# Altium PCB MCU103A.PcbDoc (part 6 of 6)
Units mm, origin at the board's own origin, x right, y up, seen from the top; angles counter-clockwise.
Board outline 58.42 x 139.7 mm, 4 copper layers (Top Signal, GND, PWR, Bottom Signal), stack 1.565 mm thick; 256 components, 210 nets, 1058 pads, 772 vias.
Unrouted connection lines stored in the file: 237.
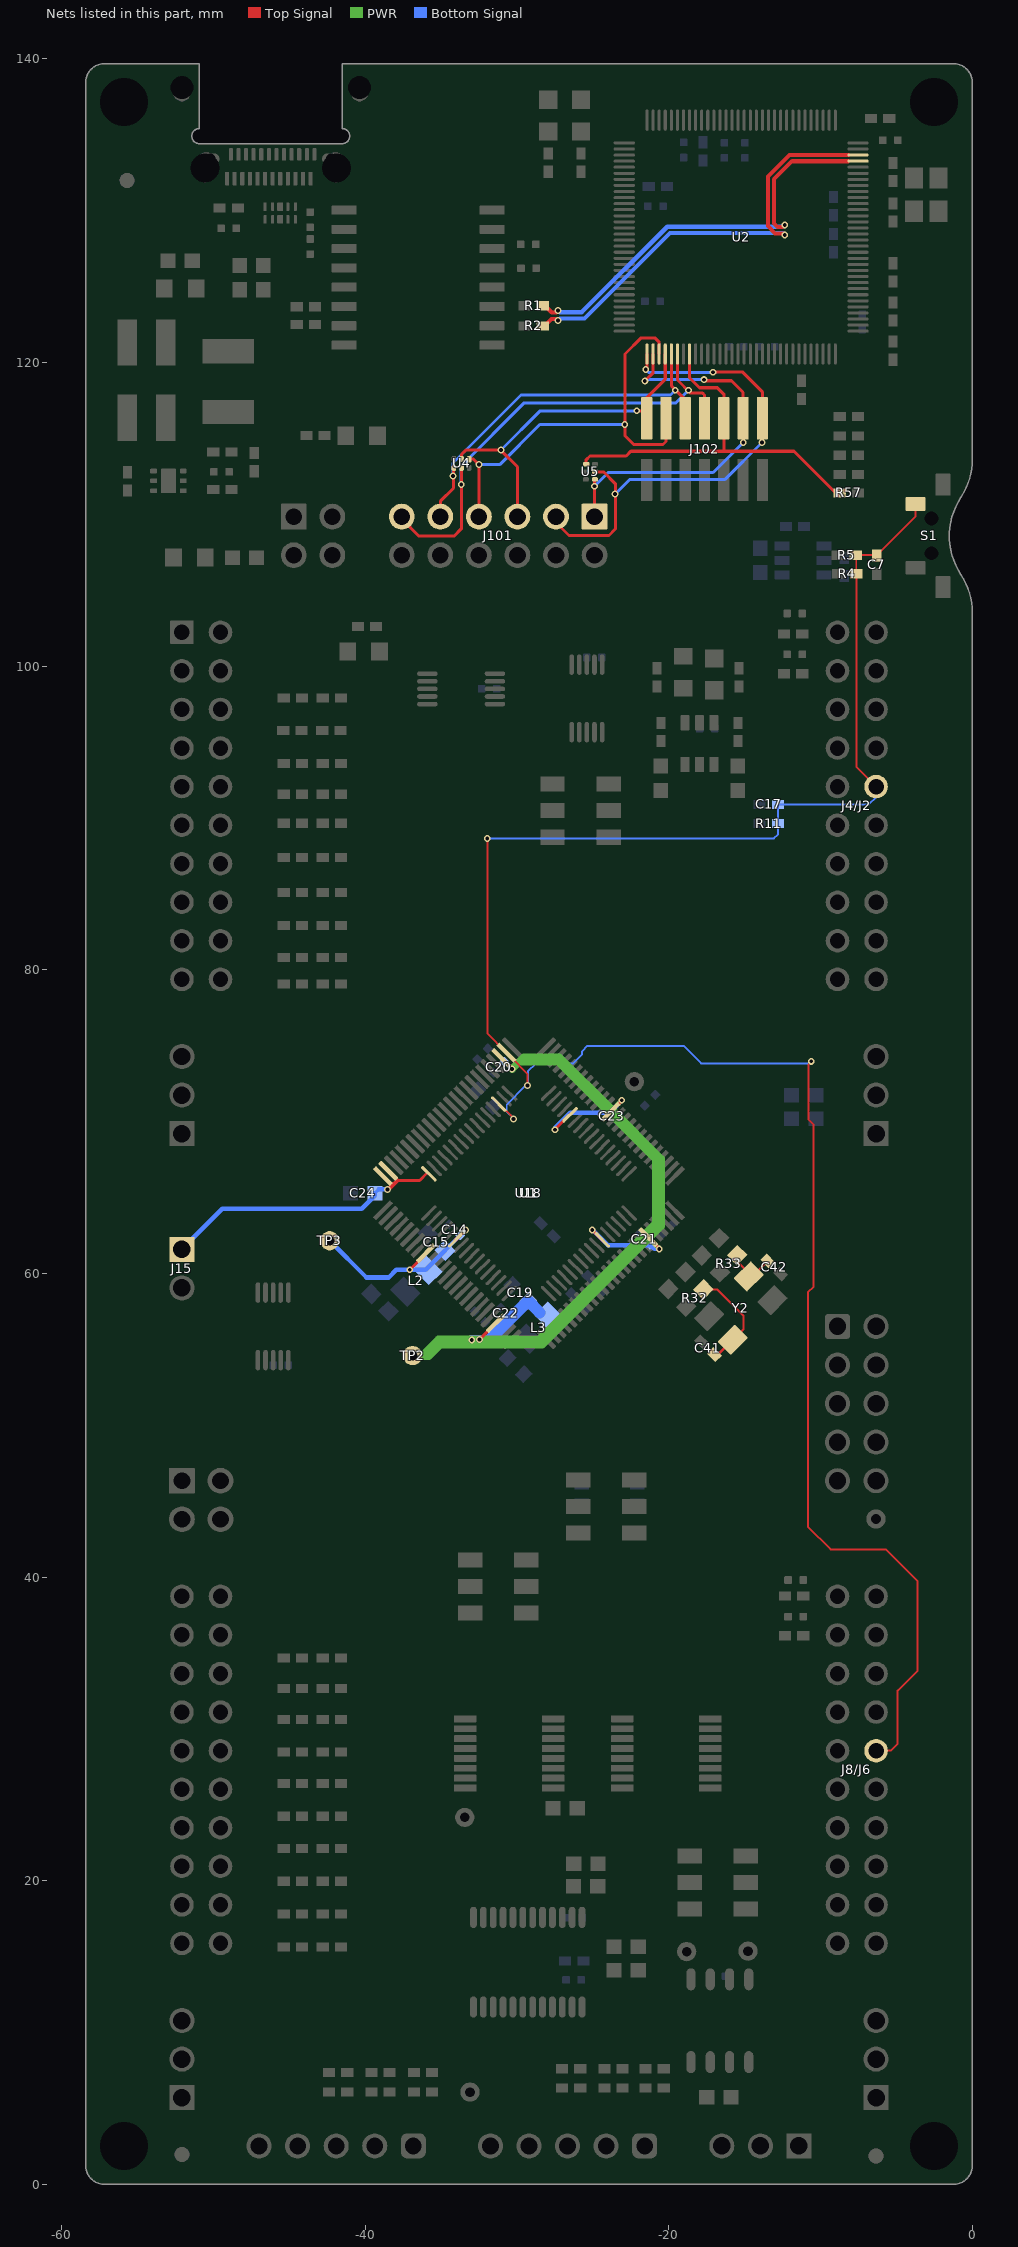
[diagram p7: the nets of this part, all layers, seen from the top]

## Via types
v1: diameter 0.45, hole 0.25, Top Signal to Bottom Signal, tented both sides, 726 vias
v2: diameter 0.5, hole 0.3, Top Signal to Bottom Signal, tented both sides, 22 vias
v3: diameter 0.7, hole 0.4, Top Signal to Bottom Signal, tented both sides, 17 vias
v4: diameter 0.4, hole 0.2, Top Signal to Bottom Signal, tented both sides, 5 vias
v5: diameter 0.5, hole 0.2, Top Signal to Bottom Signal, 2 vias

## Nets (pads, with @x,y where several pads share a name; then routed paths per layer and width w, separated by ;. In a path a pad name is that pad's centre, name@x,y a point inside that pad or via, vN(x,y) a via of type N, cw(c..) or ccw(c..) an arc to the next point about the centre after c; other vN are vias at no path point) (continued)
VDDA: C14.2 C15.1 L2.2 TP3.1 U1.34 U18.22 | length 13.7
  Top Signal w0.127: v1(-33.391,62.87) v1@-33.391,62.876
  Top Signal w0.2: v1@-37.143,60.154 U1.34@-36.126,61.171 ; U18.22@-34.073,62.194 v1@-33.391,62.876
  Bottom Signal w0.3: TP3.1@-42.337,62.162 -39.915,59.74 -38.443,59.74 -37.944,60.239 -37.079,60.239 v1(-37.066,60.252) -36.009,60.252 v1(-33.391,62.87)
VDDIO: C19.2 C20.2 C21.2 C22.2 C23.2 L3.2 TP2.1 U1.3 U1.47 U1.70 U1.88 U18.43 U18.60 | length 98.4
  Top Signal w0.2: v1@-32.523,55.612 U1.47@-31.506,56.63 ; U1.3@-31.049,74.209 v1@-30.308,73.469 ; v1@-27.515,69.494 U18.60@-26.498,70.511 ; v1@-25.014,62.85 U18.43@-24.297,62.134 ; U1.88@-23.477,71.005 -23.066,71.416 v1@-23.066,71.43 ; U1.70@-21.424,62.443 v1@-20.617,61.636
  PWR w0.3: -24.019,70.68 -23.835,70.68 -23.74,70.774 -23.099,71.416 v1@-23.099,71.422 ; -21.586,62.596 -21.586,62.583 -21.322,62.319 v1(-20.628,61.625)
  PWR w0.5: TP2.1@-36.658,54.69 -36.136,54.69 -35.17,55.656 v1(-32.47,55.656) -28.526,55.656 -21.586,62.596 -20.857,63.325 -20.857,67.518 -24.019,70.68 -27.288,73.949 -29.851,73.949 ; TP2.1@-36.494,54.559 -35.8,54.559 -35.044,55.315 -28.327,55.315 -21.322,62.319 -20.516,63.126 -20.516,67.55 -23.74,70.774 -27.217,74.251 -29.549,74.251 -29.851,73.949 ; v1(-30.326,73.475) -29.851,73.949
  Bottom Signal w0.2: v1(-32.47,55.656) v1@-32.41,55.656 ; v1(-30.326,73.475) v1@-30.326,73.478 ; v1@-27.516,69.497 v1@-27.516,69.503 ; v1@-25.069,62.921 -25.027,62.879 v1(-25.045,62.862) ; v1@-23.116,71.43 -23.066,71.43 v1@-23.066,71.416
  Bottom Signal w0.3: C20.2@-30.822,73.975 v1@-30.326,73.478 ; v1@-27.516,69.503 -27.466,69.553 -27.466,69.635 -26.496,70.605 -24.228,70.605 C23.2@-24.106,70.728 -23.769,70.728 v1@-23.066,71.43 ; v1@-25.027,62.879 -24.01,61.862 -21.307,61.862 C21.2@-21.25,61.919 -20.956,61.625 v1(-20.628,61.625)
  Bottom Signal w0.762: v1@-32.98,55.567 -31.898,55.567 C19.2@-29.267,58.198 L3.2@-28.49,57.421
  other v1: -32.98,55.631 -27.495,69.476 -23.103,71.418
VREFHI: C24.1 J15.1 U1.24 U1.25 U18.16 | length 21.9
  Top Signal w0.2: J15.1@-52.07,61.595 J15.1@-52.014,61.539 ; U1.25@-39.274,66.871 U1.25@-38.827,66.423 -38.252,65.848 -38.221,65.848 ; U1.24@-38.474,66.777 -37.831,66.134 ; U18.16@-35.892,66.657 -36.415,66.134 -37.831,66.134 ; -38.221,65.848 v1(-38.524,65.545) -38.42,65.545 -38.117,65.848 ; -38.221,65.848 -38.117,65.848 ; -38.221,65.848 -37.935,66.134 -37.831,66.134 ; -38.117,65.848 -37.831,66.134
  Bottom Signal w0.23: C24.1@-39.36,65.278 C24.1@-39.093,65.545
  Bottom Signal w0.3: J15.1@-52.07,61.595 -49.403,64.262 -40.218,64.262 -39.36,65.12 C24.1@-39.36,65.278 ; C24.1@-39.093,65.545 v1(-38.524,65.545)
XDS_DM: R1.2 U2.93 | length 28
  Top Signal w0.27: R1.2@-28.302,123.745 -28.169,123.745 -27.712,123.289 -27.44,123.289 v1(-27.297,123.432) ; v1@-12.32,129.14 -12.523,128.937 -12.837,128.937 -13.06,129.16 -13.06,132.08 -11.874,133.266 U2.93@-8.197,133.266
  Bottom Signal w0.2: v1(-27.297,123.432) -27.297,123.375 -27.266,123.344 -27.237,123.373 v1@-27.178,123.432
  Bottom Signal w0.27: v1(-27.297,123.432) -27.237,123.373 -27.181,123.317 -25.737,123.317 -20.104,128.95 -12.47,128.95 v1(-12.36,129.06)
XDS_DP: R2.2 U2.94 | length 29.2
  Top Signal w0.27: R2.2@-28.302,122.412 -28.187,122.412 -27.73,122.869 -27.356,122.869 v1@-27.27,122.782 ; v1@-12.3,128.36 -12.457,128.517 -13.011,128.517 -13.48,128.986 -13.48,132.254 -12.048,133.686 U2.94@-8.176,133.686
  Bottom Signal w0.27: v1@-27.27,122.782 -27.155,122.897 -25.563,122.897 -19.93,128.53 -12.48,128.53 v1(-12.36,128.41)
  other v1: -27.297,122.782
XDS_RESET_OUT: J102.10 R57.1 U2.40 U5.1 | length 26.4
  Top Signal w0.127: R57.1@-9.022,111.424 R57.1@-8.742,111.424
  Top Signal w0.2: U5.1@-25.444,113.306 -25.444,113.603 -25.192,113.855 -22.807,113.855 -22.499,114.163 -11.761,114.163 R57.1@-9.022,111.424 ; U2.40@-18.635,120.57 -18.635,118.995 -17.985,118.345 -16.802,118.345 -16.378,117.921 J102.10@-16.378,116.335 -16.378,114.17
XDS_RXD: J101.3 J102.14 U2.33 U5.5 | length 33.3
  Top Signal w0.127: J101.3@-27.432,109.486 J101.3@-27.432,109.855
  Top Signal w0.2: J101.3@-27.432,109.486 -27.432,109.473 -26.576,108.617 -23.947,108.617 -23.523,109.041 -23.523,112.03 -24.299,112.806 U5.5@-24.869,112.806 ; v1@-21.609,119.519 -21.435,119.693 U2.33@-21.435,120.57 ; v1@-17.098,119.368 -15.131,119.368 -13.838,118.075 J102.14@-13.838,116.335 -13.862,116.311 v1(-13.862,114.743)
  Bottom Signal w0.2: v1(-23.539,111.339) -22.591,112.287 -16.318,112.287 v1(-13.862,114.743) ; v1(-21.518,119.549) -21.333,119.364 v1(-17.098,119.364)
XDS_TCK_SWDCLK: J101.7 J102.4 U2.35 U4.1 | length 28.5
  Top Signal w0.2: U4.1@-33.153,113.64 -32.871,113.64 v1(-32.512,113.281) J101.7@-32.512,109.855 ; U2.35@-20.635,120.57 -20.635,121.35 -20.918,121.633 -21.817,121.633 -22.888,120.562 -22.888,115.177 -22.314,114.603 -20.384,114.603 -20.188,114.799 J102.4@-20.188,116.335
  Bottom Signal w0.2: v1(-32.512,113.281) -31.139,113.281 -28.499,115.921 v1(-22.902,115.921)
XDS_TDI: J101.11 J102.8 U2.38 U4.5 | length 32.4
  Top Signal w0.2: J101.11@-37.592,109.855 -37.592,109.712 -36.451,108.571 -34.154,108.571 -33.668,109.057 U4.5@-33.668,113.021 ; U2.38@-19.435,120.57 -19.435,118.857 -18.569,117.991 -17.775,117.991 -17.648,117.864 J102.8@-17.648,116.335
  Bottom Signal w0.2: v1(-33.677,111.966) -33.677,113.197 -29.526,117.348 -19.533,117.348 v1(-18.703,118.178)
XDS_TDO_SWO: J101.9 J102.6 U2.37 U4.4 | length 25.6
  Top Signal w0.2: J101.9@-35.052,109.855 -35.052,110.861 -34.184,111.729 U4.4@-34.184,113.005 ; U2.37@-19.835,120.57 -19.835,118.48 -18.918,117.563 J102.6@-18.918,116.335
  Bottom Signal w0.2: v1(-34.217,112.525) -34.217,113.388 -29.74,117.865 -19.894,117.865 v1(-19.581,118.178)
XDS_TMS_SWDIO: J101.5 J102.2 U2.36 U4.2 | length 23.3
  Top Signal w0.2: U4.2@-33.653,113.665 -33.653,113.962 -33.378,114.237 -31.077,114.237 -29.972,113.132 J101.5@-29.972,109.855 ; v1(-22.113,116.825) -21.538,116.825 J102.2@-21.458,116.905 ; J102.2@-21.458,116.335 J102.2@-21.458,116.905 ; U2.36@-20.235,120.57 -20.235,118.91 -21.458,117.687 J102.2@-21.458,116.905
  Bottom Signal w0.2: v1(-31.06,114.241) -28.476,116.825 v1(-22.113,116.825)
XDS_TXD: J101.1 J102.12 U2.34 U5.4 | length 25.5
  Top Signal w0.127: U5.4@-24.892,112.22 U5.4@-24.755,112.357
  Top Signal w0.2: J101.1@-24.892,109.855 U5.4@-24.892,112.22 ; v1(-21.58,118.788) -21.035,119.333 U2.34@-21.035,120.57 ; v1@-17.728,118.806 -15.871,118.806 -15.108,118.043 J102.12@-15.108,116.335 -15.095,116.322 v1(-15.095,114.743)
  Bottom Signal w0.2: v1(-24.901,111.858) -23.999,112.76 -17.078,112.76 v1(-15.095,114.743) ; v1@-21.402,118.877 v1(-17.691,118.877)
XRSn: C7.1 C17.2 J4/J2.16 J8/J6.56 R4.1 R5.2 R11.1 S1.4 U1.2 U18.3 | length 146.4
  Top Signal w0.127: v1@-31.953,88.657 -31.953,75.812 U1.2@-30.695,74.555 ; U18.3@-31.243,71.192 -31.203,71.192 -30.226,70.215 v1(-30.226,70.175) ; U1.2@-30.409,74.244 -30.393,74.244 -29.31,73.161 v1(-29.31,72.381) -29.458,72.381 v1@-29.467,72.372 ; v1(-10.614,73.977) -10.614,73.944 -10.811,73.747 -10.811,70.16 -10.462,69.811 -10.462,59.132 -10.836,58.758 -10.836,43.326 -9.337,41.827 -5.698,41.827 -3.611,39.74 -3.611,33.848 -4.934,32.525 -4.934,29.015 -5.374,28.575 J8/J6.56@-6.35,28.575 J8/J6.56@-6.35,28.769 ; R4.1@-7.657,106.094 -7.657,107.287 R5.2@-7.685,107.315 -6.305,107.315 -3.748,109.872 S1.4@-3.748,110.685 ; R4.1@-7.649,106.029 -7.649,93.374 J4/J2.16@-6.35,92.075
  Bottom Signal w0.127: v1(-31.96,88.657) -13.074,88.657 -12.818,88.913 R11.1@-12.818,89.632 C17.2@-12.818,90.902 -6.825,90.902 -6.35,91.377 J4/J2.16@-6.35,92.075 ; v1(-30.226,70.175) -30.226,70.217 -30.674,70.665 -30.674,71.132 v1@-29.441,72.364 ; v1@-29.459,72.381 -29.488,72.41 -29.465,72.434 -29.418,72.387 v1@-29.424,72.381 ; v1(-29.31,72.381) v1@-29.424,72.381 ; v1(-10.614,73.977) -10.614,73.854 -10.759,73.999 -10.759,73.838 -17.878,73.838 -19.031,74.991 -25.363,74.991 -25.715,74.639 -25.715,74.449 -26.34,73.824 -28.776,73.824 -29.281,73.319 -29.281,72.204 -29.384,72.307 v1@-29.441,72.364 ; v1@-29.441,72.364 v1@-29.424,72.381 ; v1@-29.441,72.364 -29.458,72.381 v1@-29.424,72.381
XTAL_X1: C42.1 R33.2 Y2.3 | length 3.5
  Top Signal w0.152: R33.2@-15.5,61.212 -15.5,60.799 Y2.3@-14.506,59.805 ; Y2.3@-14.732,59.805 Y2.3@-14.506,59.805 ; C42.1@-13.482,60.828 Y2.3@-14.506,59.805
XTAL_X2: C41.1 R32.2 Y2.1 | length 8.4
  Top Signal w0.152: R32.2@-17.728,58.944 -16.807,58.944 -15.078,57.215 -15.078,56.329 Y2.1@-15.704,55.703 ; C41.1@-16.996,54.659 -16.766,54.659 Y2.1@-15.792,55.633 ; Y2.1@-16.324,55.084 Y2.1@-15.704,55.703 ; Y2.1@-15.704,56.502 Y2.1@-15.704,55.703
pads on no net: FID1.1 FID2.1 FID3.1 FID4.1 FID5.1 FID6.1 J11.9 J102.7 M1.0 M2.0 M3.0 M4.0 M5.0 M6.0 M7.0 M8.0 M9.0 M10.0 M11.0 M12.0 MH1.1 MH2.1 MH3.1 MH4.1 S1. U1.37 U1.41 U1.42 U2.1 U2.2 U2.5 U2.6 U2.11 U2.12 U2.13 U2.14 U2.15 U2.18 U2.19 U2.20 U2.21 U2.22 U2.23 U2.24 U2.25 U2.27 U2.29 U2.30 U2.31 U2.32 U2.41 U2.42 U2.43 U2.44 U2.45 U2.46 U2.49 U2.50 U2.53 U2.54 U2.56 U2.57 U2.65 U2.67 U2.71 U2.72 U2.73 U2.74 U2.75 U2.76 U2.77 U2.78 U2.81 U2.82 U2.83 U2.84 U2.85 U2.86 U2.91 U2.92 U2.95 U2.97 U2.98 U2.99 U2.100 U2.102 U2.103 U2.104 U2.105 U2.106 U2.107 U2.108 U2.109 U2.110 U2.111 U2.112 U2.116 U2.117 U2.118 U2.119 U2.120 U2.121 U2.123 U2.124 U2.125 U2.126 U2.127 U2.128 U5.2 U15.5 U15.8 U16.3@-45.597,129.434 U16.8@-45.597,130.27 U101.5 U101.7@-52.959,111.76 U101.7@-52.959,112.66 USB101.A2 USB101.A3 USB101.A8 USB101.A10 USB101.A11 USB101.B2 USB101.B3 USB101.B8 USB101.B10 USB101.B11

## Polygon pours and split planes (outlines as drawn)
+3V3_XDS110 on PWR "PWR-+3V3_XDS110" (solid, remove dead copper, pour order 12): -35.67,139.053 -0.635,139.053 -0.635,108.965 -43.315,108.965 -43.315,117.348 -37.249,117.348 -35.675,118.922
USB_GND on PWR "Top Signal-USB_GND" (solid, remove dead copper, pour order 49): -58.545,119.969 -38.523,119.969 -38.175,120.317 -38.175,139.757 -57.488,139.757 -57.488,139.683 -58.545,138.626
+5V0_MCU on PWR "PWR_+5V0_MCU_P041" (solid, remove dead copper, pour order 41): -43.849,108.2 -57.773,108.2 -57.773,0.393 -57.785,0.381 -19.747,0.381 -19.747,13.493 -20.478,14.224 -51.354,14.224 -53.975,16.844 -53.975,102.647 -52.612,104.01 -44.746,104.01 -43.849,104.907
+3V3_MCU on PWR "PWR-+3V3_MCU" (solid, remove dead copper, pour order 10): -53.349,102.928 -53.349,17.232 -51.083,14.966 -20.185,14.704 -19.095,13.724 -19.095,0.647 -0.635,0.635 -0.635,14.822 -0.635,108.2 -43.328,108.2 -43.328,104.599 -44.9,103.131 -53.214,103.131
+5V0_XDS110 on PWR "PWR_+5V0_XDS110_P042" (solid, remove dead copper, pour order 42): -57.773,117.348 -57.773,108.965 -43.51,108.965 -43.51,117.348
VDDIO on PWR "PWR-VDDIO" (solid, remove dead copper, pour order 8): -37.916,53.652 -27.787,53.652 -20.06,61.379 -20.06,69.251 -25.767,74.958 -35.692,74.958 -43.84,66.81 -43.84,59.576
VDD on PWR "PWR-VDD" (solid, remove dead copper, pour order 6): -29.297,56.09 -22.442,62.945 -22.442,67.588 -27.046,72.192 -30.761,72.192 -30.869,72.084 -36.529,66.424 -36.529,59.392 -33.227,56.09
GND on Top Signal "GND-GND" (solid, remove dead copper, pour order 57): -58.442,117.302 -37.295,117.302 -35.61,118.987 -35.61,139.742 -1.012,139.742 0.015,138.715 0.015,0.85 -0.848,-0.013 -57.498,-0.013 -58.427,0.916 -58.427,117.262 -58.405,117.284
USB_GND on Top Signal "Top Signal-USB_GND" (solid, remove dead copper, pour order 20): -58.545,119.969 -38.523,119.969 -38.175,120.317 -38.175,139.757 -57.488,139.757 -57.488,139.683 -58.545,138.626
GND on GND "GND-GND" (solid, remove dead copper, pour order 53): -58.442,117.302 -37.295,117.302 -35.61,118.987 -35.61,139.742 -1.012,139.742 0.015,138.715 0.015,0.85 -0.848,-0.013 -57.498,-0.013 -58.427,0.916 -58.427,117.262 -58.405,117.284
USB_GND on GND "Top Signal-USB_GND" (solid, remove dead copper, pour order 47): -58.545,119.969 -38.523,119.969 -38.175,120.317 -38.175,139.757 -57.488,139.757 -57.488,139.683 -58.545,138.626
GND on Bottom Signal "GND-GND" (solid, remove dead copper, pour order 59): -58.442,117.302 -37.295,117.302 -35.61,118.987 -35.61,139.742 -1.012,139.742 0.015,138.715 0.015,0.85 -0.848,-0.013 -57.498,-0.013 -58.427,0.916 -58.427,117.262 -58.405,117.284
USB_GND on Bottom Signal "Top Signal-USB_GND" (solid, remove dead copper, pour order 51): -58.545,119.969 -38.523,119.969 -38.175,120.317 -38.175,139.757 -57.488,139.757 -57.488,139.683 -58.545,138.626

## Keep-outs
Keep-Out Layer:
  lines w0.2: -50.92,139.7 -57.15,139.7 ccw(c-57.15,138.43) -58.42,138.43 -58.42,1.27 ccw(c-57.15,1.27) -57.15,0 -1.27,0 ccw(c-1.27,1.27) 0,1.27 0,103.505 ccw(c-4.614,103.505) -0.762,106.045 cw(c3.09,108.585) -0.762,111.125 ccw(c-4.614,113.665) 0,113.665 0,138.43 ccw(c-1.27,138.43) -1.27,139.7 -41.52,139.7
  text ".Layer_Name" at -43.384,-21.709 h1.52

## Other copper
Top Signal:
  pour cut-out: -11.955,42.67 -11.959,42.056 -12.95,42.056 -12.95,42.645
  pour cut-out: -18.451,55.654 -18.934,55.171 -19.251,55.49 -18.769,55.972
  pour cut-out: -32.562,41.946 -32.567,41.332 -34.738,41.332 -34.738,41.891
  pour cut-out: -24.864,45.299 -27.066,45.299 -27.064,45.749 -24.864,45.749
  pour cut-out: -21.173,45.329 -23.374,45.329 -23.372,45.779 -21.173,45.779
  pour cut-out: -19.501,46.432 -20.503,46.432 -20.501,46.434 -20.501,46.882 -19.521,46.882 -19.511,46.892 -19.501,46.882
  pour cut-out: -46.182,79.553 -46.182,80.555 -46.18,80.553 -45.732,80.553 -45.732,79.573 -45.722,79.563 -45.732,79.553
  pour cut-out: -22.935,134.47 -22.935,122.07 -21.435,120.57 -9.035,120.57 -7.535,122.07 -7.535,134.47 -9.035,135.97 -21.435,135.97
  pour cut-out: -30.413,71.96 -27.831,71.96 -27.831,71.784 -22.616,66.569 -22.616,63.987 -27.919,58.684 -30.501,58.684 -35.846,64.029 -35.846,66.527
  pour cut-out: -28.544,92.549 -29.546,92.549 -29.544,92.551 -29.544,92.999 -28.564,92.999 -28.554,93.009 -28.544,92.999
  pour cut-out: -25.966,92.529 -26.968,92.529 -26.966,92.531 -26.966,92.979 -25.986,92.979 -25.976,92.989 -25.966,92.979
  pour cut-out: -24.036,84.62 -25.038,84.62 -25.036,84.622 -25.036,85.07 -24.056,85.07 -24.046,85.08 -24.036,85.07
  pour cut-out: -39.95,84.432 -39.95,85.434 -39.948,85.432 -39.5,85.432 -39.5,84.452 -39.49,84.442 -39.5,84.432
  pour cut-out: -36.374,85.45 -35.372,85.45 -35.374,85.448 -35.374,85 -36.354,85 -36.364,84.99 -36.374,85
  pour cut-out: -33.201,85.97 -32.199,85.97 -32.201,85.968 -32.201,85.52 -33.181,85.52 -33.191,85.51 -33.201,85.52
  pour cut-out: -32.771,127.279 -32.771,121.804 -31.7,121.804 -31.7,122.024 -31.7,127.279 -32.751,127.279
  pour cut-out: -51.865,123.98 -52.315,123.98 -52.315,124.13 -51.865,124.13
  pour cut-out: -17.744,101.137 -18.31,101.141 -18.31,101.419 -17.751,101.419
  pour cut-out: -28.245,40.58 -28.25,39.966 -30.421,39.966 -30.421,40.525
  pour cut-out: -32.012,40.566 -32.017,39.952 -34.188,39.952 -34.188,40.511
  pour cut-out: -17.564,19.31 -17.564,18.751 -19.677,18.751 -19.677,19.31
  pour cut-out: -13.844,19.332 -13.849,18.718 -16.02,18.718 -16.02,19.277
  pour cut-out: -13.827,21.147 -13.832,20.533 -16.003,20.533 -16.003,21.092
  pour cut-out: -19.448,21.045 -19.452,20.479 -19.73,20.479 -19.73,21.038
  pour cut-out: -23.546,83.382 -24.112,83.386 -24.112,83.664 -23.553,83.664
  text ".Layer_Name" at -43.888,-21.59 h1.52
GND:
  text ".Layer_Name" at -42.043,-21.667 h1.52
PWR:
  text ".Layer_Name" at -41.964,-21.552 h1.52
Bottom Signal:
  pour cut-out: -32.249,63.352 -31.851,63.756 -32.048,63.953 -32.443,63.557
  pour cut-out: -36.122,58.553 -35.724,58.957 -35.921,59.153 -36.316,58.758
  pour cut-out: -28.013,55.423 -27.615,55.827 -27.811,56.024 -28.207,55.628
  text ".Layer_Name" at -43.594,-21.656 h1.52

## Silkscreen, mask and mechanical layers (free items; w line width, h text height)
Top Overlay:
  drawing of 11755 lines, arcs and shapes, not listed
  text "XDS110 Out" at -20.95,118.364 h1.3
  text "+5V0" at -57.785,117.094 h1.3 r270
  text "GND" at -52.056,117.069 h1.3 r270
  text "XRSn" at -4.705,113.168 h1.85
  text "+5V0" at -45.056,105.97 h1.14 r270
  text "+3V3" at -42.545,105.975 h1.3 r270
  text "TDO" at -35.425,105.703 h1.3 r270
  text "TDI" at -37.965,105.664 h1.3 r270
  text "TCK" at -32.966,105.664 h1.3 r270
  text "TMS" at -30.395,105.664 h1.3 r270
  text "TXD<<" at -27.791,105.649 h1.3 r270
  text "RXD>>" at -25.217,105.596 h1.3 r270
  text "IO.0" at -13.58,105.537 h1.3
  text "IO.1" at -13.589,104.648 h1.3
  text "B2/C6" at -56.397,99.314 h1.3
  text "IO.5" at -4.712,99.325 h1.3
  text "IO.32" at -4.712,96.901 h1.3
  text "IO.28" at -56.22,96.774 h1.3
  text "IO.2" at -12.351,96.774 h1.3
  text "A6" at -48.108,96.698 h1.3
  text "A2" at -48.133,94.668 h1.3
  text "IO.3" at -12.337,94.234 h1.3
  text "IO.59" at -4.712,94.234 h1.3
  text "B6" at -48.057,93.767 h1.3
  text "1" at -28.683,93.218 h1.3
  text "1" at -23.149,93.218 h1.3
  text "IO.29" at -56.214,92.964 h1.3
  text "A3" at -48.133,92.094 h1.3
  text "IO.10" at -12.941,91.694 h1.3
  text "XRSn" at -4.712,91.694 h1.3
  text "B9" at -48.057,91.192 h1.3
  text "A14" at -48.184,89.594 h1.3
  text "SEL1" at -29.05,89.273 h1.3 r90
  text "SEL2" at -21.899,89.225 h1.3 r90
  text "B3" at -54.727,89.154 h1.3
  text "IO.11" at -12.898,89.154 h1.3
  text "IO.8" at -4.712,89.154 h1.3
  text "B14" at -48.082,88.692 h1.3
  text "0" at -28.81,87.122 h1.3
  text "0" at -23.149,87.122 h1.3
  text "A11" at -48.133,87.025 h1.3
  text "IO.9" at -55.627,86.642 h1.3
  text "IO.33" at -12.924,86.614 h1.3
  text "IO.17" at -4.712,86.614 h1.3
  text "B10" at -48.031,86.144 h1.3
  text "SEL1:" at -36.237,85.281 h1.3
  text "IO28," at -31.733,85.281 h1.3
  text "IO15," at -27.152,85.281 h1.3
  text "B12" at -48.133,84.48 h1.3
  text "IO.24" at -56.231,84.074 h1.3
  text "IO.48" at -12.946,84.074 h1.3
  text "IO.37" at -4.712,84.074 h1.3
  text "SEL2" at -36.237,84.01 h1.3
  text "IO29" at -31.733,84.01 h1.3
  text "IO56" at -27.152,84.01 h1.3
  text "C2" at -48.133,83.602 h1.3
  text ":" at -34.502,82.474 h1.3
  text "0" at -35.391,82.372 h1.3
  text "0" at -34.029,82.372 h1.3
  text "XDS" at -31.114,82.372 h1.3
  text "BP" at -26.204,82.372 h1.3
  text "A7" at -48.133,81.915 h1.3
  text "IO.51" at -56.172,81.534 h1.3
  text "IO.14" at -12.957,81.534 h1.3
  text "IO.22" at -4.712,81.534 h1.3
  text "C3" at -48.108,81.026 h1.3
  text ":" at -34.48,80.886 h1.3
  text "0" at -35.369,80.785 h1.3
  text "1" at -33.845,80.785 h1.3
  text "XDS" at -31.114,80.785 h1.3
  text "NC" at -26.204,80.785 h1.3
  text ":" at -34.474,79.311 h1.3
  text "A1" at -48.133,79.248 h1.3
  text "1" at -35.236,79.21 h1.3
  text "0" at -34.001,79.21 h1.3
  text "BP" at -30.555,79.21 h1.3
  text "BP" at -26.204,79.21 h1.3
  text "IO.34" at -56.231,78.994 h1.3
  text "IO.30" at -12.941,78.994 h1.3
  text "IO.23" at -4.712,78.994 h1.3
  text "B7" at -48.031,78.359 h1.3
  text ":" at -34.465,77.751 h1.3
  text "1" at -35.227,77.65 h1.3
  text "1" at -33.83,77.65 h1.3
  text "BP" at -30.555,77.65 h1.3
  text "XDS" at -26.625,77.65 h1.3
  text "VDD" at -21.113,71.963 h1.3
  text "*" at -17.595,63.327 h0.64
  text "VDDA" at -46.304,61.769 h1.3
  text "VREFHI" at -57.925,61.163 h1.3
  text "*" at -21.774,59.125 h0.64
  text "FSI" at -9.337,57.844 h1.3
  text "TXCLK" at -4.826,55.88 h1.3
  text "RXCLK" at -14.793,55.245 h1.3
  text "VDDIO" at -41.599,54.225 h1.3
  text "TXD0" at -4.826,50.8 h1.3
  text "RXD0" at -13.843,50.546 h1.3
  text "RXD1" at -13.335,48.133 h1.3
  text "TXD1" at -4.826,48.133 h1.3
  text "1" at -21.586,47.422 h1.3
  text "LAUNCHXL- / F280039C" at -40.513,47.117 h1.27 r0.23
  text "+5V0 / TO / J7" at -47.752,43.307 h1.3
  text "GND" at -5.367,43.259 h1.3
  text "+3V3 / TO / J5" at -57.48,43.155 h1.3
  text "GPIO24" at -27.7,42.459 h1.3 r90
  text "GPIO32" at -19.861,42.459 h1.3 r90
  text "IO.12" at -13.935,41.967 h1.3
  text "IO.13" at -13.944,41.078 h1.3
  text "BP" at -35.56,40.767 h1.3
  text "BP" at -28.194,40.767 h1.3
  text "BOOT" at -25.523,40.715 h1.3
  text "0" at -21.713,40.715 h1.3
  text "Q1" at -35.659,38.989 h1.3
  text "Q2" at -28.194,38.99 h1.3
  text "J12" at -36.195,37.211 h1.3
  text "J13" at -28.194,37.211 h1.3
  text "C1" at -54.788,35.814 h1.3
  text "IO.27" at -4.839,35.814 h1.3
  text "QEP Select" at -34.323,35.262 h1.3
  text "IO.15" at -56.233,33.274 h1.3
  text "B11" at -48.056,33.274 h1.3
  text "IO.47" at -4.839,33.274 h1.3
  text "IO.6" at -12.335,33.147 h1.3
  text "A10" at -48.132,31.165 h1.3
  text "IO.57" at -4.839,30.734 h1.3
  text "IO.7" at -12.332,30.48 h1.3
  text "B1" at -48.031,30.251 h1.3
  text "IO.56" at -56.254,29.464 h1.3
  text "A5" at -48.056,28.194 h1.3
  text "IO.16" at -12.923,28.194 h1.3
  text "XRSn" at -4.839,28.194 h1.3
  text "A4" at -48.107,26.1 h1.3
  text "A9" at -54.868,25.654 h1.3
  text "IO.35" at -12.902,25.654 h1.3
  text "IO.60" at -4.839,25.654 h1.3
  text "B8" at -48.056,25.222 h1.3
  text "CAN" at -17.865,24.228 h1.3
  text "+3V3" at -37.283,23.828 h1.3
  text "B4" at -48.056,23.471 h1.3
  text "ROUTE" at -18.373,23.234 h1.3
  text "IO.21" at -12.871,23.241 h1.3
  text "IO.58" at -56.25,23.114 h1.3
  text "IO.61" at -4.839,23.114 h1.3
  text "C8" at -48.132,22.571 h1.3
  text "BP" at -21.061,21.209 h1.3
  text "IO.4" at -55.673,20.574 h1.3
  text "IO.20" at -4.839,20.574 h1.3
  text "B5" at -48.056,20.473 h1.3
  text "IO.31" at -12.871,20.447 h1.3
  text "A12" at -48.107,18.473 h1.3
  text "*" at -56.89,18.182 h0.64
  text "IO.18" at -56.25,18.034 h1.3
  text "IO.41" at -12.871,18.034 h1.3
  text "IO.26" at -4.839,18.034 h1.3
  text "XCVR" at -22.377,17.779 h1.3
  text "C5" at -48.056,17.551 h1.3
  text "A0" at -48.158,15.921 h1.3
  text "*" at -56.89,15.633 h0.64
  text "IO.19" at -56.244,15.494 h1.3
  text "IO.25" at -4.839,15.494 h1.3
  text "IO.40" at -12.914,15.367 h1.3
  text "B15" at -48.056,15.037 h1.3
  text "+5V0" at -31.99,5.79 h1.3
  text "CAN" at -13.716,4.318 h1.3
  text "EQEP2" at -43.546,4.241 h1.3
  text "EQEP1" at -28.36,4.241 h1.3
  text "GND" at -48.006,0.254 h1.3
  text "5V" at -45.085,0.254 h1.3
  text "2I" at -42.453,0.254 h1.3
  text "2B" at -40.005,0.254 h1.3
  text "2A" at -37.465,0.254 h1.3
  text "GND" at -32.766,0.254 h1.3
  text "5V" at -29.845,0.254 h1.3
  text "1I" at -27.07,0.254 h1.3
  text "1B" at -24.638,0.254 h1.3
  text "1A" at -22.098,0.254 h1.3
  text "GND" at -17.526,0.254 h1.3
  text "LO" at -14.605,0.254 h1.3
  text "HI" at -11.938,0.254 h1.3
  text ".Layer_Name" at -43.817,-21.635 h1.52
Bottom Overlay:
  drawing of 12859 lines, arcs and shapes, not listed
  text "LAUNCHXL-F280039C / Development Kit" at 0,135.15 h2.54
  text "www.ti.com/launchpad" at 0,114.935 h2.54
  text "J3/J1" at -49.033,104.055 h1.7
  text "J2/J4" at -5.886,103.991 h1.7
  text "40" at -10.592,101.854 h1.3
  text "39" at -10.599,99.418 h1.3
  text "2" at -53.772,99.314 h1.3
  text "19" at -3.505,99.314 h1.3
  text "38" at -10.592,96.901 h1.3
  text "3" at -53.772,96.774 h1.3
  text "23" at -46.558,96.774 h1.3
  text "18" at -3.505,96.774 h1.3
  text "4" at -53.772,94.234 h1.3
  text "24" at -46.558,94.234 h1.3
  text "37" at -10.592,94.234 h1.3
  text "17" at -3.505,94.234 h1.3
  text "5" at -53.772,91.694 h1.3
  text "25" at -46.558,91.694 h1.3
  text "36" at -10.592,91.694 h1.3
  text "16" at -3.505,91.694 h1.3
  text "6" at -53.772,89.154 h1.3
  text "26" at -46.558,89.154 h1.3
  text "35" at -10.592,89.154 h1.3
  text "15" at -3.505,89.154 h1.3
  text "7" at -53.772,86.614 h1.3
  text "27" at -46.558,86.614 h1.3
  text "34" at -10.592,86.614 h1.3
  text "14" at -3.505,86.614 h1.3
  text "8" at -53.772,84.074 h1.3
  text "28" at -46.558,84.074 h1.3
  text "33" at -10.592,84.074 h1.3
  text "13" at -3.505,84.074 h1.3
  text "9" at -53.772,81.534 h1.3
  text "29" at -46.558,81.534 h1.3
  text "32" at -10.592,81.534 h1.3
  text "12" at -3.505,81.534 h1.3
  text "10" at -53.772,78.994 h1.3
  text "31" at -10.592,78.994 h1.3
  text "11" at -3.759,78.994 h1.3
  text "30" at -46.579,78.977 h1.3
  text "'.PRJ_Number'.PCB_Rev" at -21.692,78.667 h2.75
  text "J6/J8" at -5.783,40.612 h1.7
  text "J7/J5" at -49.01,40.589 h1.7
  text "80" at -10.592,38.481 h1.3
  text "42" at -53.772,35.814 h1.3
  text "79" at -10.592,35.814 h1.3
  text "59" at -3.378,35.803 h1.3
  text "43" at -53.772,33.274 h1.3
  text "63" at -46.558,33.274 h1.3
  text "78" at -10.592,33.274 h1.3
  text "58" at -3.378,33.263 h1.3
  text "44" at -53.772,30.734 h1.3
  text "64" at -46.558,30.734 h1.3
  text "77" at -10.592,30.734 h1.3
  text "57" at -3.378,30.723 h1.3
  text "45" at -53.772,28.194 h1.3
  text "65" at -46.558,28.194 h1.3
  text "76" at -10.592,28.194 h1.3
  text "56" at -3.378,28.183 h1.3
  text "46" at -53.772,25.654 h1.3
  text "66" at -46.558,25.654 h1.3
  text "75" at -10.592,25.654 h1.3
  text "55" at -3.378,25.643 h1.3
  text "47" at -53.772,23.114 h1.3
  text "67" at -46.558,23.114 h1.3
  text "74" at -10.592,23.114 h1.3
  text "54" at -3.378,23.103 h1.3
  text "48" at -53.772,20.574 h1.3
  text "68" at -46.558,20.574 h1.3
  text "73" at -10.592,20.574 h1.3
  text "53" at -3.378,20.563 h1.3
  text "49" at -53.772,18.034 h1.3
  text "69" at -46.558,18.034 h1.3
  text "72" at -10.592,18.034 h1.3
  text "52" at -3.378,18.023 h1.3
  text "50" at -53.772,15.494 h1.3
  text "70" at -46.558,15.494 h1.3
  text "71" at -10.592,15.494 h1.3
  text "51" at -3.632,15.494 h1.3
  text "GND" at -45.974,0.381 h1.3
  text "5V" at -43.815,0.381 h1.3
  text "2I" at -41.275,0.381 h1.3
  text "2B" at -38.735,0.381 h1.3
  text "2A" at -36.195,0.381 h1.3
  text "GND" at -30.734,0.381 h1.3
  text "5V" at -28.575,0.381 h1.3
  text "1I" at -26.247,0.381 h1.3
  text "1B" at -23.622,0.381 h1.3
  text "1A" at -21.082,0.381 h1.3
  text ".Layer_Name" at -43.391,-21.637 h1.52
Top Paste:
  text ".Layer_Name" at -43.718,-21.91 h1.52
Bottom Paste:
  text ".Layer_Name" at -43.6,-21.792 h1.52
Top Solder:
  text ".Layer_Name" at -43.84,-21.933 h1.52
Bottom Solder:
  text ".Layer_Name" at -43.485,-21.78 h1.52
Drill Guide:
  text ".Layer_Name" at -43.586,-21.78 h1.52
M1 Board Outline:
  lines w0.254: -50.92,139.7 -57.15,139.7 ccw(c-57.15,138.43) -58.42,138.43 -58.42,1.27 ccw(c-57.15,1.27) -57.15,0 -1.27,0 ccw(c-1.27,1.27) 0,1.27 0,103.505 ccw(c-4.614,103.505) -0.762,106.045 cw(c3.09,108.585) -0.762,111.125 ccw(c-4.614,113.665) 0,113.665 0,138.43 ccw(c-1.27,138.43) -1.27,139.7 -41.52,139.7
  text ".Layer_Name" at -43.811,-21.801 h1.52
M2 Board Dimensions:
  text ".Layer_Name" at -43.66,-21.842 h1.52
M3 3D STEP Top:
  text ".Layer_Name" at -43.84,-21.704 h1.52
M4 3D STEP Bottom:
  text ".Layer_Name" at -43.81,-21.756 h1.52
M5 Assembly Top:
  lines w0.254: -65.824,-23.537 101.816,-23.537 ; -65.824,-18.373 101.867,-18.373 ; -65.824,-13.208 -65.824,-28.702 35.903,-28.702 101.867,-28.702 101.867,-13.208 -65.811,-13.208 -65.811,-28.702 -25.794,-28.702 ; -3.213,-28.702 -3.213,-13.208 ; 28.969,-18.373 28.969,-13.208 ; 50.305,-18.373 50.305,-13.208 ; 66.103,-28.867 66.103,-23.715
  text "COMPONENTS MARKED 'DNP' SHOULD NOT BE POPULATED." at -29.108,-8.001 h1.52
  text "ASSEMBLY VARIANT:" at -29.121,-10.935 h1.52
  text ".VariantName" at -2.807,-10.935 h1.52
  text "PCB VIEWED FROM TOP SIDE" at -64.211,-16.565 h1.52
  text "BOARD #:" at -1.308,-16.565 h1.52
  text ".PRJ_Number" at 12.548,-16.565 h1.52
  text "REV:" at 33.998,-16.565 h1.52
  text ".PCB_Rev" at 41.402,-16.565 h1.52
  text "SVN REV:" at 55.283,-16.565 h1.52
  text ".VersionControl_RevNumber" at 68.135,-16.565 h1.52
  text ".Layer_Name" at -43.675,-21.755 h1.52
  text "TID #:" at -1.308,-21.73 h1.52
  text ".TID" at 12.548,-21.73 h1.52
  text "PLOT NAME =" at -64.211,-26.945 h1.52
  text ".plot_File_Name" at -43.752,-26.945 h1.52
  text "GENERATED    :" at -1.257,-26.945 h1.52
  text ".Print_Date" at 20.828,-26.945 h1.52
  text ".Print_Time" at 39.345,-26.945 h1.52
  text "TEXAS INSTRUMENTS" at 71.463,-26.945 h1.52
M6 Assembly Bottom:
  lines w0.254: -65.811,-18.398 101.879,-18.398 ; -65.761,-23.563 101.879,-23.563 ; -30.048,-28.892 -30.048,-23.741 ; -14.249,-18.398 -14.249,-13.233 ; 7.087,-18.398 7.087,-13.233 ; 39.268,-28.727 39.268,-13.233 ; 61.849,-28.727 101.867,-28.727 101.867,-13.233 -65.811,-13.233 -65.811,-28.727 0.152,-28.727 101.879,-28.727 101.879,-13.233
  text "COMPONENTS MARKED 'DNP' SHOULD NOT BE POPULATED." at 96.609,-8.001 h1.52
  text ".VariantName" at 70.091,-10.947 h1.52
  text "ASSEMBLY VARIANT:" at 96.482,-10.947 h1.52
  text ".VersionControl_RevNumber" at -32.08,-16.59 h1.52
  text "SVN REV:" at -19.228,-16.59 h1.52
  text ".PCB_Rev" at -5.347,-16.59 h1.52
  text "REV:" at 2.057,-16.59 h1.52
  text ".PRJ_Number" at 23.508,-16.59 h1.52
  text "BOARD #:" at 37.363,-16.59 h1.52
  text "PCB VIEWED FROM BOTTOM SIDE" at 100.266,-16.59 h1.52
  text ".Layer_Name" at -43.65,-21.768 h1.52
  text ".TID" at 23.508,-21.755 h1.52
  text "TID #:" at 37.363,-21.755 h1.52
  text "TEXAS INSTRUMENTS" at -35.408,-26.971 h1.52
  text ".Print_Time" at -3.289,-26.971 h1.52
  text ".Print_Date" at 15.227,-26.971 h1.52
  text "GENERATED    :" at 37.313,-26.971 h1.52
  text ".plot_File_Name" at 79.807,-26.971 h1.52
  text "PLOT NAME =" at 100.266,-26.971 h1.52
M7 LPKF Text Top:
  text ".Layer_Name" at -43.65,-21.661 h1.52
M8 LPKF Text Bottom:
  text ".Layer_Name" at -43.634,-21.794 h1.52
M9 Title Sheet:
  drawing of 57 lines, arcs and shapes, not listed
  text "1" at -39.628,204.127 h1.78
  text "2" at 23.762,204.127 h1.78
  text "3" at 86.991,204.127 h1.78
  text "4" at 150.66,204.127 h1.78
  text "5" at 214.135,204.127 h1.78
  text "6" at 277.762,204.127 h1.78
  text "A" at -68.999,175.095 h1.78
  text "A" at 306.921,175.095 h1.78
  text "B" at -68.999,114.643 h1.78
  text "B" at 306.921,114.643 h1.78
  text "C" at -68.999,54.318 h1.78
  text "C" at 306.921,54.318 h1.78
  text "PROJECT TITLE:" at 229.705,7.048 h1.14
  text ".PRJ_Title" at 230.975,3.662 h1.78
  text "DESIGNED FOR:" at 229.705,-0.597 h1.14
  text ".PRJ_Customer" at 230.975,-4.153 h1.78
  text "D" at -68.999,-5.88 h1.78
  text "D" at 306.921,-5.88 h1.78
  text "FILE NAME:" at 229.705,-8.217 h1.14
  text ".PCB_File_Name_No_Path" at 230.975,-11.265 h1.78
  text "Texas Instruments (TI) and/or its licensors do not warrant the accuracy or completeness of this specification" at 103.48,-15.376 h1.14
  text "ENGINEER:" at 229.705,-15.583 h1.14
  text "LAYOUT BY:" at 267.932,-15.583 h1.14
  text "or any information contained therein. TI and/or its licensors do not warrant that this design will meet" at 102.337,-18.237 h1.14
  text ".PRJ_Engineer" at 230.975,-19.52 h1.78
  text ".PCB_Layout" at 269.215,-19.52 h1.78
  text "the specifications, will be suitable for your application or fit for any particular purpose, or will operate in" at 102.337,-21.099 h1.14
  text ".Layer_Name" at -43.764,-21.806 h1.52
  text "ALTIUM DESIGNER VERSION:" at 267.932,-23.457 h1.14
  text "an implementation. TI and/or its licensors do not warrant that the design is production worthy. You should" at 102.337,-23.961 h1.14
  text "completely validate and test your design implementation to confirm the system functionality for your application." at 103.48,-26.822 h1.14
  text ".print_Scale" at 230.975,-26.843 h1.78
  text ".Application_BuildNumber" at 269.215,-26.843 h1.78
  text "1" at -39.628,-32.093 h1.78
  text "2" at 23.762,-32.093 h1.78
  text "3" at 86.991,-32.093 h1.78
  text "4" at 150.66,-32.093 h1.78
  text "5" at 214.135,-32.093 h1.78
  text "6" at 277.762,-32.093 h1.78
M10 Fab Notes:
  drawing of 189 lines, arcs and shapes, not listed
  text "DESIGN INFORMATION" at 256.134,161.625 h1.52
  text "MIN. TRACK WIDTH:" at 239.762,158.269 h1.52
  text "5" at 267.607,158.269 h1.52
  text "MIL" at 271.538,158.269 h1.52
  text "0.15" at 265.049,155.321 h1.52
  text "MIN. CLEARANCE:" at 239.762,155.116 h1.52
  text "mm" at 271.538,155.116 h1.52
  text "MIN. VIA PAD SIZE:" at 239.762,151.963 h1.52
  text "0.45" at 265.049,151.963 h1.52
  text "mm" at 271.538,151.963 h1.52
  text "0.05mm (2MIL)" at 257.415,148.664 h1.52
  text "MINIMUM ANNULAR RING" at 231.4,148.455 h1.52
  text "EXTERNAL" at 275.398,148.455 h1.52
  text "PER" at 236.48,145.658 h1.52
  text "IPC-D-275 CLASS 2 LEVEL C" at 242.068,145.657 h1.52
  text "MIL, HOLES" at 279.869,143.105 h1.52
  text "+/-" at 269.9,142.887 h1.52
  text "+/-" at 291.592,142.887 h1.52
  text "REGISTRATION TOLERANCES:" at 231.4,142.86 h1.52
  text "METAL" at 261.874,142.86 h1.52
  text "5" at 276.51,142.86 h1.52
  text "3" at 297.668,142.86 h1.52
  text "MIL" at 300.621,142.86 h1.52
  text "HOLE SIZE TOLERANCE (UNLESS OTHERWISE SPECIFIED):" at 231.4,140.363 h1.52
  text "+/-" at 291.592,140.29 h1.52
  text "5" at 297.668,140.263 h1.52
  text "MIL" at 300.621,140.263 h1.52
  text "MATERIAL:" at 229.501,136.767 h1.52
  text "FR-4 High Tg" at 254.556,133.502 h1.52
  text "X" at 250.888,133.299 h1.52
  text "FR-408" at 240.194,133.185 h1.52
  text "OTHER" at 277.989,133.185 h1.52
  text "62 MIL (1.6mm) +/-10%" at 248.325,129.552 h1.52
  text "X" at 245.274,129.489 h1.52
  text "THICKNESS:" at 231.4,129.343 h1.52
  text "OTHER" at 280.961,129.343 h1.52
  text "TOLERANCE:" at 231.4,125.83 h1.52
  text "ANSI IPC-6012 TYPE 3 CLASS 2" at 257.466,125.83 h1.52
  text "IPC-A600" at 274.879,122.606 h1.85
  text "OTHER +/-" at 257.466,122.167 h1.52
  text "X" at 253.162,122.098 h1.52
  text "BOW & TWIST:" at 231.4,118.479 h1.52
  text "ANSI IPC-6012 TYPE 3 CLASS 2" at 257.466,118.479 h1.52
  text "X" at 252.908,115.367 h1.52
  text "IPC-A600" at 274.879,114.859 h1.85
  text "OTHER +/-" at 257.466,114.753 h1.52
  text "DRILLING:" at 229.501,111.436 h1.52
  text "NC_DRILL FILES" at 274.23,108.764 h1.52
  text "REFERENCE:" at 231.4,108.664 h1.52
  text "X" at 248.094,108.661 h1.52
  text "AS SHOWN" at 252.615,108.664 h1.52
  text "X" at 270.979,108.664 h1.52
  text "OTHER" at 281.799,105.051 h1.52
  text "PTH COPPER THICKNESS:" at 231.392,104.961 h1.52
  text "X" at 260.328,104.961 h1.52
  text "20-30 um" at 263.579,104.961 h1.52
  text "BOARD FINISH:" at 229.501,101.212 h1.52
  text "SILKSCREEN:" at 233.443,98.415 h1.52
  text "X" at 257.771,98.415 h1.52
  text "TOP" at 260.743,98.415 h1.52
  text "X" at 270.725,98.415 h1.52
  text "BOTTOM" at 273.722,98.415 h1.52
  text "SILKSCREEN COLOR:" at 233.443,94.473 h1.52
  text "X" at 257.746,94.473 h1.52
  text "WHITE" at 260.743,94.473 h1.52
  text "OTHER" at 273.722,94.473 h1.52
  text "RED" at 289.916,91.084 h2.03
  text "GREEN" at 264.07,90.829 h1.52
  text "OTHER" at 279.767,90.829 h1.52
  text "X" at 276.047,90.729 h1.52
  text "SOLDER RESIST COLOR:" at 233.443,90.655 h1.52
  text "MATTE" at 264.07,86.911 h1.52
  text "SEMI-GLOSS" at 279.756,86.895 h1.52
  text "IMMERSION GOLD (ENIG)" at 256.45,82.523 h1.52
  text "ENEPIG" at 290.424,82.34 h1.52
  text "SURFACE FINISH:" at 229.501,82.314 h1.52
  text "IMM. TIN/SILVER OR EQUIV" at 237.871,78.826 h1.52
  text "X" at 234.112,78.791 h1.52
  text "OTHER" at 274.23,78.726 h1.52
  text "ARRAY/PANEL:" at 229.501,74.78 h1.52
  text "CUT AND TRIM PER M1 BOARD OUTLINE" at 256.45,74.571 h1.52
  text "X" at 251.917,74.524 h1.52
  text "N.C. ROUTE" at 256.45,71.117 h1.52
  text "V. SCORE" at 278.446,71.117 h1.52
  text "CERTIFICATION:" at 229.501,67.838 h1.52
  text "MATERIALS AND WORKMANSHIP FOR ALL PCBS" at 247.916,67.838 h1.52
  text "TO MEET OR EXCEED THE REQUIREMENTS OF:" at 247.916,65.448 h1.52
  text "X" at 283.844,62.24 h1.52
  text "X" at 238.708,62.181 h1.52
  text "ANSI IPC-A-600F CLASS ->" at 241.959,62.181 h1.52
  text "2" at 286.613,62.181 h1.52
  text "1" at 278.612,62.143 h1.52
  text "3" at 295.604,62.143 h1.52
  text "X" at 259.333,58.43 h1.52
  text "RoHS" at 262.584,58.43 h1.52
  text "OTHER" at 278.952,58.43 h1.52
  text "PER ORDER" at 289.037,58.43 h1.52
  text "ALL BOARDS MUST MEET OR EXCEED UL94-V0 REQUIREMENTS." at 230.2,54.523 h1.52
  text "PCB MUST BEAR THE UL94V-0 UL REGISTERED MATERIAL ID NUMBER" at 230.2,51.575 h1.52
  text "ADDITIONAL REQUIREMENTS:" at 229.501,47.271 h1.52
  text "MICROSECTION:" at 231.4,44.55 h1.52
  text "YES" at 254.405,44.55 h1.52
  text "X" at 261.468,40.945 h1.52
  text "REQUIRED" at 276.287,40.884 h1.52
  text "BARE BOARD ELEC. TEST:" at 231.4,40.812 h1.52
  text "NONE" at 264.565,40.812 h1.52
  text "PER ORDER" at 291.324,40.812 h1.52
  text "XX MIL VIAS REQUIRE NON-CONDUCTIVE FILL AND PLANARIZE" at 235.671,35.606 h1.5
  text "XX MIL VIAS REQUIRE CONDUCTIVE FILL AND PLANARIZE" at 235.874,32.965 h1.52
  text "OUTER XX MIL VIAS REQUIRE 50 OHM SINGLE-ENDED IMPEDANCE" at 235.849,28.815 h1.47
  text "LAYER 2 & 3 (INNER LAYERS) XX MIL WIDE, XX MIL SPACE / TRACES REQUIRE 100 OHM DIFFERENTIAL IMPEDANCE" at 235.646,22.828 h1.52
  text ".Layer_Name" at -43.488,-21.777 h1.52
M12 Stackup:
  drawing of 295 lines, arcs and shapes, not listed
  text "Use Standard 4 Layer Stackup" at 119.539,152.539 h6.35
  text "Layer" at 106.419,145.974 h1.52
  text "Name" at 116.831,145.974 h1.52
  text "Material" at 140.447,145.974 h1.52
  text "Thickness" at 162.285,145.974 h1.52
  text "Constant" at 178.791,145.974 h1.52
  text "Board Layer Stack" at 193.265,145.974 h1.52
  text "Top Overlay" at 116.831,142.926 h1.52
  text "Top Solder" at 116.831,139.878 h1.52
  text "Solder Resist" at 140.447,139.878 h1.52
  text "0.40mil" at 162.285,139.878 h1.52
  text "3.5" at 178.791,139.878 h1.52
  text "1" at 106.419,136.83 h1.52
  text "Top Signal" at 116.831,136.83 h1.52
  text "Copper" at 140.447,136.83 h1.52
  text "1.40mil" at 162.285,136.83 h1.52
  text "Dielectric 1" at 116.831,133.782 h1.52
  text "FR-4" at 140.447,133.782 h1.52
  text "8.00mil" at 162.285,133.782 h1.52
  text "4.2" at 178.791,133.782 h1.52
  text "2" at 106.419,130.734 h1.52
  text "GND" at 116.831,130.734 h1.52
  text "Copper" at 140.447,130.734 h1.52
  text "1.40mil" at 162.285,130.734 h1.52
  text "Dielectric 2" at 116.831,127.686 h1.52
  text "FR-4" at 140.447,127.686 h1.52
  text "40.00mil" at 162.285,127.686 h1.52
  text "4.2" at 178.791,127.686 h1.52
  text "3" at 106.419,124.638 h1.52
  text "PWR" at 116.831,124.638 h1.52
  text "Copper" at 140.447,124.638 h1.52
  text "1.40mil" at 162.285,124.638 h1.52
  text "Dielectric 3" at 116.831,121.59 h1.52
  text "FR-4" at 140.447,121.59 h1.52
  text "8.00mil" at 162.285,121.59 h1.52
  text "4.2" at 178.791,121.59 h1.52
  text "4" at 106.419,118.542 h1.52
  text "Bottom Signal" at 116.831,118.542 h1.52
  text "Copper" at 140.447,118.542 h1.52
  text "1.40mil" at 162.285,118.542 h1.52
  text "Bottom Solder" at 116.831,115.494 h1.52
  text "Solder Resist" at 140.447,115.494 h1.52
  text "0.40mil" at 162.285,115.494 h1.52
  text "3.5" at 178.791,115.494 h1.52
  text "Bottom Overlay" at 116.831,112.446 h1.52
  text ".Layer_Name" at -43.84,-21.857 h1.52
M13 Component Bodies Top:
  text ".Layer_Name" at -43.613,-21.735 h1.52
M14 Component Bodies Bottom:
  text ".Layer_Name" at -43.805,-21.584 h1.52
M15 Courtyards Top:
  text ".Layer_Name" at -43.582,-21.608 h1.52
M16 Courtyards Bottom:
  text ".Layer_Name" at -43.674,-21.64 h1.52
Drill Drawing:
  drawing of 152 lines, arcs and shapes, not listed
  text "Symbol" at 134.199,96.994 h1.83
  text "Quantity" at 141.833,96.994 h1.83
  text "Finished Hole Size" at 150.266,96.994 h1.83
  text "Plated" at 166.435,96.994 h1.83
  text "Hole Type" at 173.017,96.994 h1.83
  text "Drill Layer Pair" at 182.546,96.994 h1.83
  text "Hole Tolerance" at 201.74,96.994 h1.83
  text "2" at 141.833,93.836 h1.52
  text "35.43mil (0.900mm)" at 150.266,93.836 h1.52
  text "NPTH" at 166.435,93.836 h1.52
  text "Round" at 173.017,93.836 h1.52
  text "Top Signal - Bottom Signal" at 182.546,93.836 h1.52
  text "4" at 141.833,90.679 h1.52
  text "125.00mil (3.175mm)" at 150.266,90.679 h1.52
  text "NPTH" at 166.435,90.679 h1.52
  text "Round" at 173.017,90.679 h1.52
  text "Top Signal - Bottom Signal" at 182.546,90.679 h1.52
  text "7" at 141.833,87.521 h1.52
  text "7.87mil (0.200mm)" at 150.266,87.521 h1.52
  text "PTH" at 166.435,87.521 h1.52
  text "Round" at 173.017,87.521 h1.52
  text "Top Signal - Bottom Signal" at 182.546,87.521 h1.52
  text "726" at 141.833,84.363 h1.52
  text "9.84mil (0.250mm)" at 150.266,84.363 h1.52
  text "PTH" at 166.435,84.363 h1.52
  text "Round" at 173.017,84.363 h1.52
  text "Top Signal - Bottom Signal" at 182.546,84.363 h1.52
  text "22" at 141.833,81.205 h1.52
  text "11.81mil (0.300mm)" at 150.266,81.205 h1.52
  text "PTH" at 166.435,81.205 h1.52
  text "Round" at 173.017,81.205 h1.52
  text "Top Signal - Bottom Signal" at 182.546,81.205 h1.52
  text "17" at 141.833,78.048 h1.52
  text "15.75mil (0.400mm)" at 150.266,78.048 h1.52
  text "PTH" at 166.435,78.048 h1.52
  text "Round" at 173.017,78.048 h1.52
  text "Top Signal - Bottom Signal" at 182.546,78.048 h1.52
  text "8" at 141.833,74.89 h1.52
  text "25.00mil (0.635mm)" at 150.266,74.89 h1.52
  text "PTH" at 166.435,74.89 h1.52
  text "Round" at 173.017,74.89 h1.52
  text "Top Signal - Bottom Signal" at 182.546,74.89 h1.52
  text "80" at 141.833,71.732 h1.52
  text "40.16mil (1.020mm)" at 150.266,71.732 h1.52
  text "PTH" at 166.435,71.732 h1.52
  text "Round" at 173.017,71.732 h1.52
  text "Top Signal - Bottom Signal" at 182.546,71.732 h1.52
  text "20" at 141.833,68.574 h1.52
  text "43.31mil (1.100mm)" at 150.266,68.574 h1.52
  text "PTH" at 166.435,68.574 h1.52
  text "Round" at 173.017,68.574 h1.52
  text "Top Signal - Bottom Signal" at 182.546,68.574 h1.52
  text "10" at 141.833,65.417 h1.52
  text "43.31mil (1.100mm)" at 150.266,65.417 h1.52
  text "PTH" at 166.435,65.417 h1.52
  text "Round" at 173.017,65.417 h1.52
  text "Top Signal - Bottom Signal" at 182.546,65.417 h1.52
  text "+/-1.97mil" at 201.74,65.417 h1.52
  text "27" at 141.833,62.259 h1.52
  text "45.28mil (1.150mm)" at 150.266,62.259 h1.52
  text "PTH" at 166.435,62.259 h1.52
  text "Round" at 173.017,62.259 h1.52
  text "Top Signal - Bottom Signal" at 182.546,62.259 h1.52
  text "2" at 141.833,59.101 h1.52
  text "27.56mil (0.700mm)" at 150.266,59.101 h1.52
  text "PTH" at 166.435,59.101 h1.52
  text "Slot" at 173.017,59.101 h1.52
  text "Top Signal - Bottom Signal" at 182.546,59.101 h1.52
  text "2" at 141.833,55.944 h1.52
  text "59.06mil (1.500mm)" at 150.266,55.944 h1.52
  text "PTH" at 166.435,55.944 h1.52
  text "Slot" at 173.017,55.944 h1.52
  text "Top Signal - Bottom Signal" at 182.546,55.944 h1.52
  text "2" at 141.833,52.786 h1.52
  text "74.80mil (1.900mm)" at 150.266,52.786 h1.52
  text "PTH" at 166.435,52.786 h1.52
  text "Slot" at 173.017,52.786 h1.52
  text "Top Signal - Bottom Signal" at 182.546,52.786 h1.52
  text "929 Total" at 141.833,49.628 h1.52
  text "Slot definitions :" at 134.199,47.418 h1.52
  text "Routed Path Length" at 145.647,47.418 h1.52
  text "= Calculated from tool start centre position to tool end centre position." at 159.356,47.418 h1.52
  text "Hole Length" at 145.647,46.155 h1.52
  text "= Routed Path Length + Tool Size = Slot length as defined in the PCB layout" at 154.282,46.155 h1.52
  text ".Layer_Name" at -43.353,-21.661 h1.52
Mechanical 17:
  text ".Layer_Name" at -43.535,-21.762 h1.52
Mechanical 18:
  text ".Layer_Name" at -43.485,-21.831 h1.52
Mechanical 19:
  text ".Layer_Name" at -43.481,-21.64 h1.52

## Dimensions
-58.42,0 to -58.42,139.7 on M2 Board Dimensions
-58.42,0 to 0,0 on M2 Board Dimensions

## Text inside footprints (layer, text, board x,y; h text height)
J1/J3: Top Overlay "21" at -50.038,104.013 h1.3; Top Overlay "30" at -50.165,76.835 h1.3; Top Overlay "1" at -52.197,104.013 h1.3; Top Overlay "10" at -52.629,76.835 h1.3; Top Overlay "J3" at -48.133,104.267 h1.3; Top Overlay "J1" at -55.118,104.14 h1.3
J4/J2: Top Overlay "40" at -9.525,104.013 h1.3; Top Overlay "31" at -9.398,76.835 h1.3; Top Overlay "11" at -6.782,76.835 h1.3; Top Overlay "20" at -6.985,104.013 h1.3; Top Overlay "J2" at -5.271,104.267 h1.3; Top Overlay "J4" at -10.795,104.267 h1.3
J5/J7: Top Overlay "61" at -50.038,40.513 h1.3; Top Overlay "70" at -50.165,13.335 h1.3; Top Overlay "41" at -52.705,40.513 h1.3; Top Overlay "50" at -52.629,13.335 h1.3; Top Overlay "J7" at -48.3,40.513 h1.3; Top Overlay "J5" at -55.092,40.513 h1.3
J8/J6: Top Overlay "J8" at -10.795,40.814 h1.3; Top Overlay "J6" at -5.08,40.715 h1.3; Top Overlay "60" at -6.985,40.513 h1.3; Top Overlay "51" at -6.782,13.335 h1.3; Top Overlay "71" at -9.398,13.335 h1.3; Top Overlay "80" at -9.525,40.513 h1.3
Logo3: Bottom Overlay "For evaluation only; not FCC approved for resale." at -13.97,4.064 h1.52